# Altium PCB ZYNQ-HS-DEV-PCB.PcbDoc (part 8 of 10)
Units mm, origin at the board's own origin, x right, y up, seen from the top; angles counter-clockwise.
Board outline 125.25 x 111 mm, 10 copper layers (S1 (SIG), S2 (GND), S3 (SIG), S4 (GND), S5 (PWR), S6 (SIG), S7 (GND), S8 (SIG), S9 (GND), S10 (SIG)), stack 1.597 mm thick; 539 components, 408 nets, 2443 pads, 876 vias.
Unrouted connection lines stored in the file: 1310.
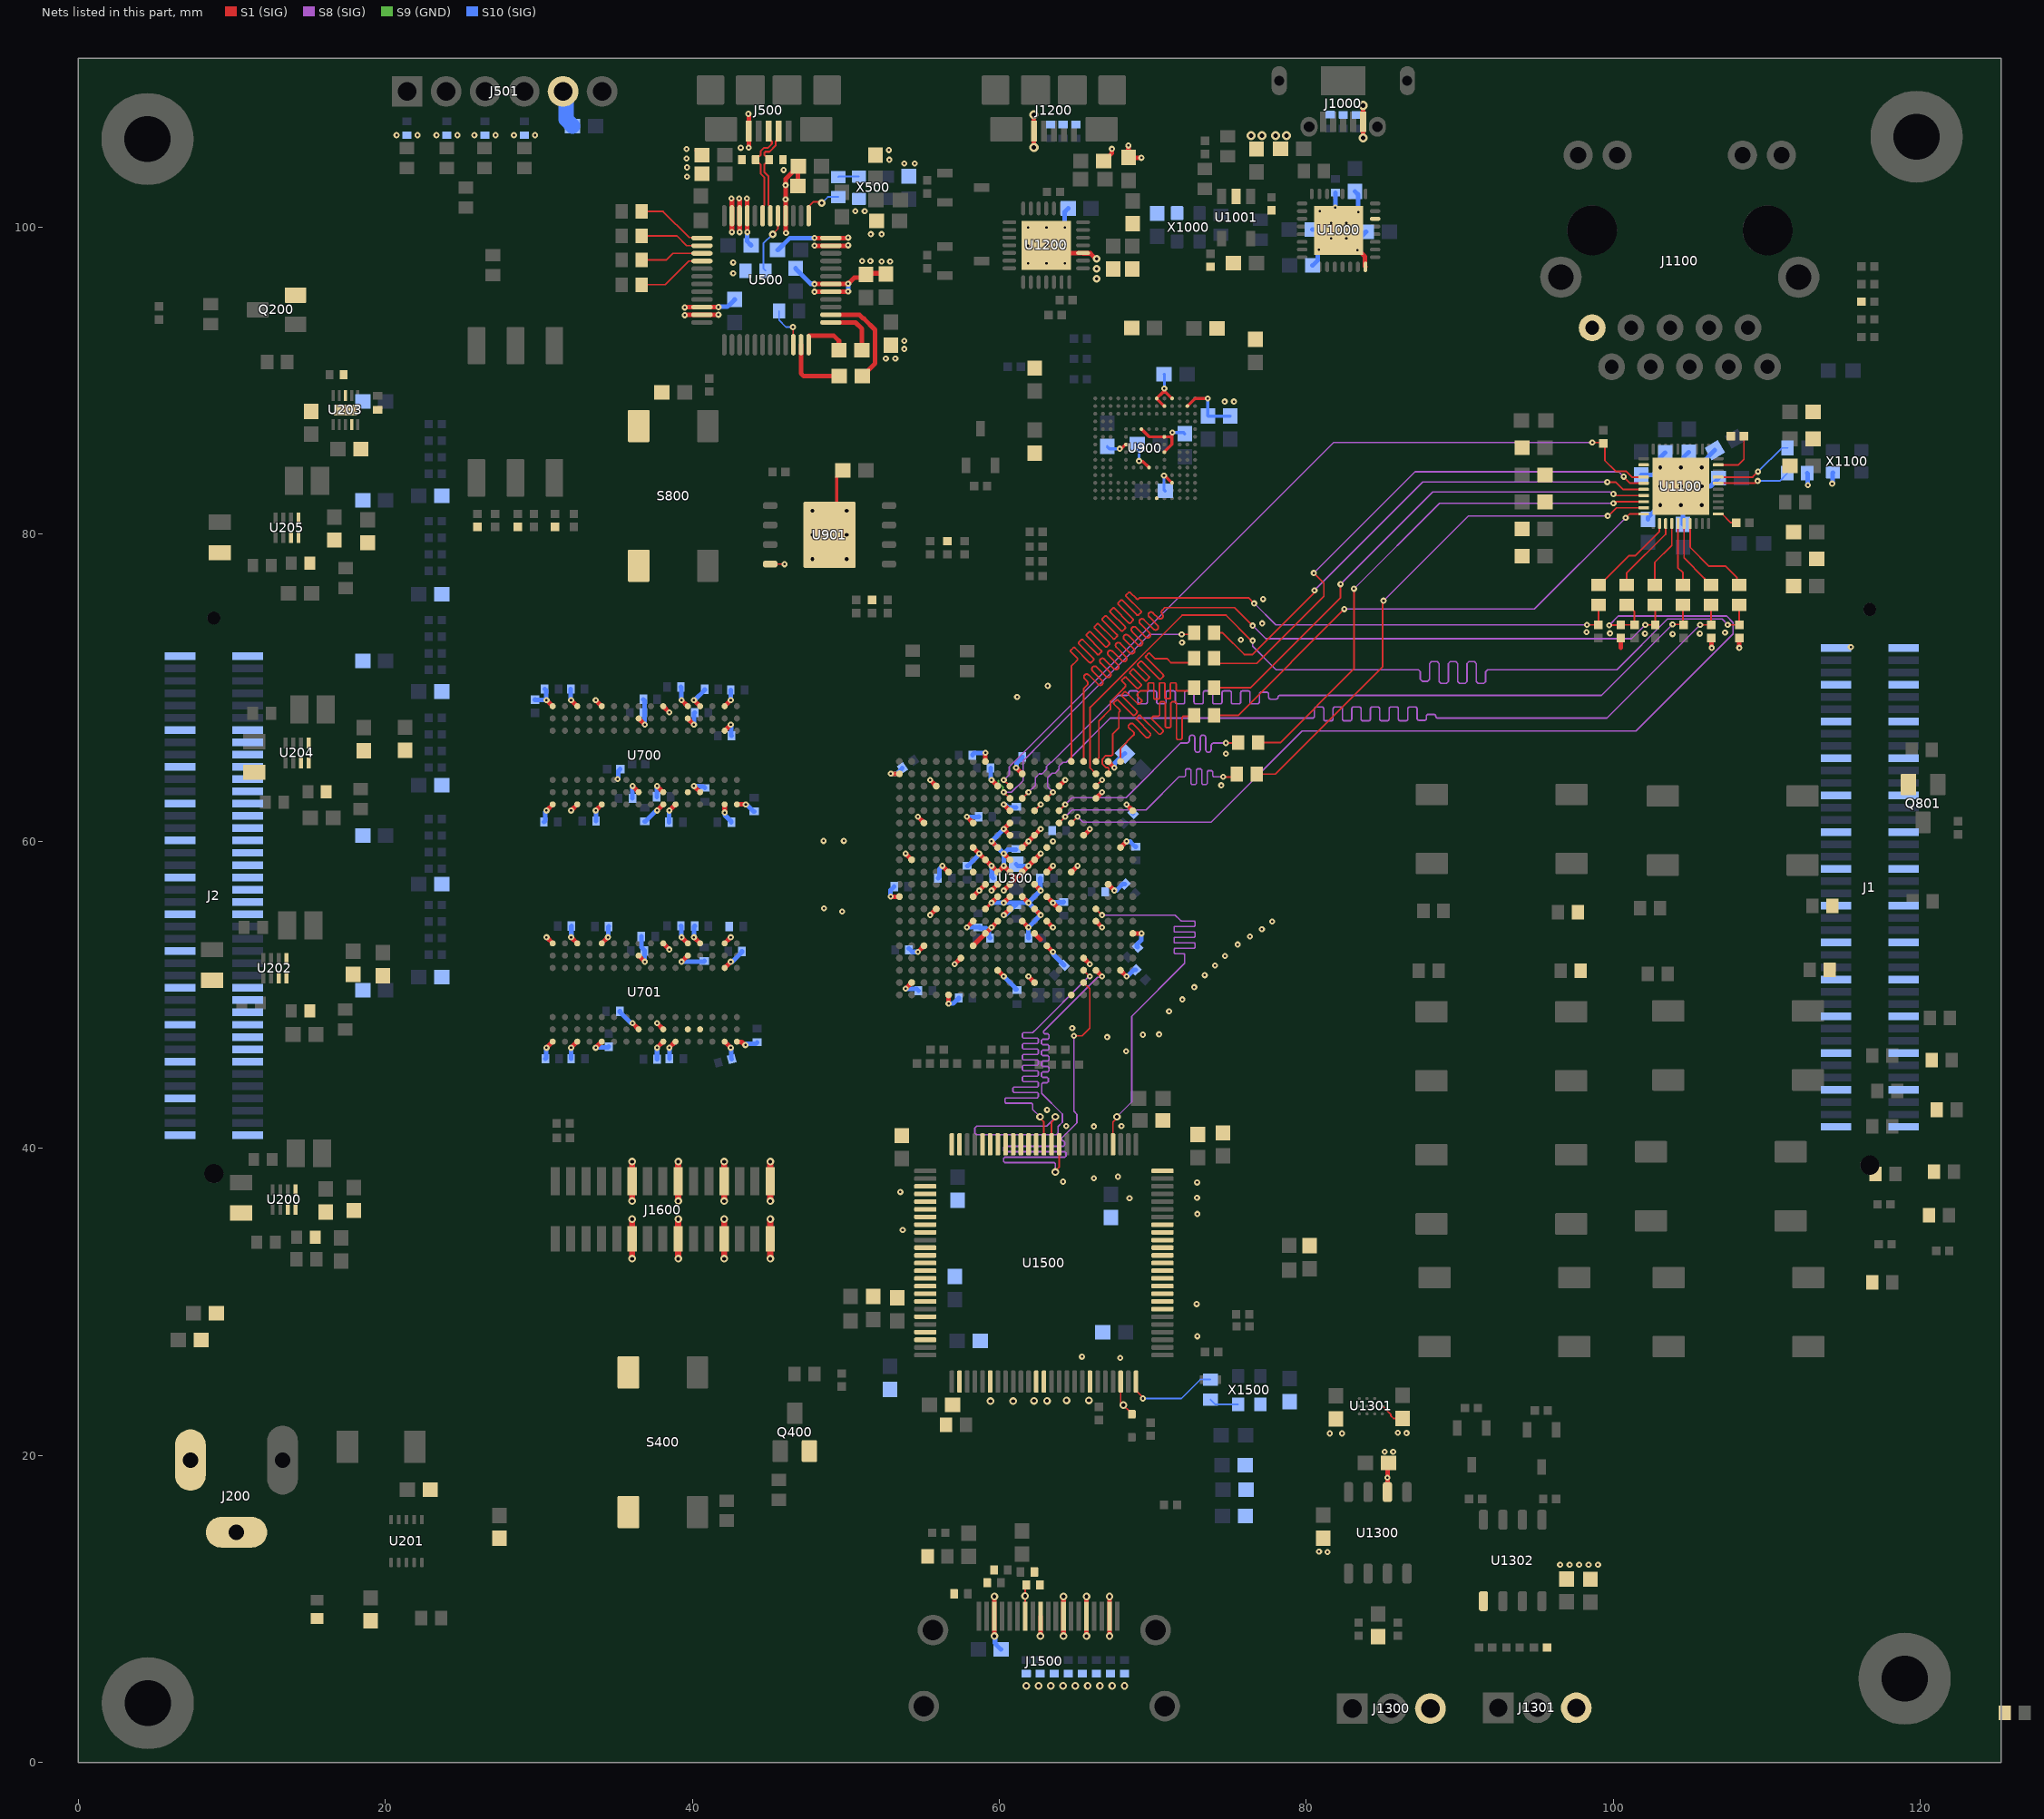
[diagram p12: the nets of this part, all layers, seen from the top]

## Via types
v1: diameter 0.4, hole 0.15, S1 (SIG) to S10 (SIG), tented both sides, 746 vias
v2: diameter 0.5, hole 0.25, S1 (SIG) to S10 (SIG), tented both sides, 108 vias
v3: diameter 0.5, hole 0.2, S1 (SIG) to S10 (SIG), tented both sides, 11 vias
v4: diameter 0.6, hole 0.3, S1 (SIG) to S10 (SIG), tented both sides, 10 vias
v5: diameter 0.45, hole 0.15, S1 (SIG) to S10 (SIG), tented both sides, 1 vias

## Nets (pads, with @x,y where several pads share a name; then routed paths per layer and width w, separated by ;. In a path a pad name is that pad's centre, name@x,y a point inside that pad or via, vN(x,y) a via of type N, cw(c..) or ccw(c..) an arc to the next point about the centre after c; other vN are vias at no path point) (continued)
ETH_MDIO: R1113.1 U300.C10 U1100.14 | length 53.3
  S1 (SIG) w0.11: v1(60.288,63.995) U300.C10@60.688,63.595 ; v1(98.625,85.975) 99.13,85.975 99.18,85.925 R1113.1@99.18,85.805 ; R1113.1@99.35,85.925 99.205,85.78 99.37,85.78 99.445,85.705 99.445,84.803 100.143,84.105 100.822,84.105 101.202,83.725 U1100.14@101.975,83.725
  S8 (SIG) w0.1: v1(60.288,63.995) 60.644,64.351 60.644,64.846 81.773,85.975 v1(98.625,85.975)
ETH_NINT: R1114.1 U300.C17 U1100.31 | length 2
  S1 (SIG) w0.11: U300.C17@66.288,63.595 v1(66.688,63.995) ; U1100.31@106.825,81.325 107.072,81.325 107.624,80.773 107.977,80.773 R1114.1@108,80.75
ETH_PHY_NRST: R805.1 U802.4 U1100.12
ETH_PHY_RX_CLK: R1109.1 U1100.27 | length 6
  S1 (SIG) w0.11: U1100.27@105,80.7 105,79.164 106.241,77.924 107.315,77.924 108.038,77.201 108.038,76.862 R1109.1@108.2,76.7
ETH_PHY_RX_CTL: R1108.1 U1100.26 | length 4.8
  S1 (SIG) w0.11: U1100.26@104.6,80.7 104.6,78.465 105.945,77.12 105.945,77.045 106.29,76.7 R1108.1@106.365,76.7
ETH_PHY_RXD0: R1104.1 U1100.25 | length 4.1
  S1 (SIG) w0.11: U1100.25@104.2,80.7 104.2,77.83 104.53,77.5 R1104.1@104.53,76.7
ETH_PHY_RXD1: R1105.1 U1100.24 | length 4.5
  S1 (SIG) w0.11: R1105.1@102.695,76.7 102.695,78.173 103.8,79.278 U1100.24@103.8,80.7
ETH_PHY_RXD2: R1106.1 U1100.23 | length 5.1
  S1 (SIG) w0.11: R1106.1@100.86,76.7 100.86,77.455 103.4,79.995 U1100.23@103.4,80.7
ETH_PHY_RXD3: R1107.1 U1100.22 | length 5.9
  S1 (SIG) w0.11: R1107.1@99.025,76.7 99.1,76.7 101.015,78.615 101.43,78.615 103,80.185 U1100.22@103,80.7
ETH_PS_NRST: R810.2 U300.E12 U803.2 | length 0.6
  S1 (SIG) w0.11: U300.E12@62.288,61.995 v1(62.688,62.395)
ETH_PS_SCTRO: U802.3 U803.4
ETH_PS_TX_CLK: R811.2 U300.A19 | length 20.6
  S1 (SIG) w0.11: U300.A19@67.888,65.195 67.888,66.063 68.738,66.912 68.776,66.951 68.776,67.054 68.406,67.425 68.406,67.527 68.561,67.682 68.664,67.682 69.594,66.751 69.697,66.751 69.851,66.906 69.851,67.009 68.921,67.939 68.921,68.042 69.075,68.197 69.178,68.197 70.397,66.978 70.5,66.978 70.654,67.133 70.654,67.235 69.926,67.964 69.926,68.067 69.999,68.139 70.312,68.139 70.367,68.139 70.44,68.212 70.44,69.01 70.513,69.083 70.731,69.083 70.804,69.01 70.804,67.47 70.877,67.397 71.095,67.397 71.168,67.47 71.168,69.01 71.241,69.083 71.459,69.083 71.532,69.01 71.532,66.699 71.605,66.626 71.823,66.626 71.896,66.699 71.896,68.067 71.969,68.139 72.3,68.139 72.639,68.139 R811.2@72.7,68.2
ETH_PS_TX_CTL: R816.2 U300.F14 | length 17.3
  S1 (SIG) w0.11: U300.F14@63.888,61.195 v1(64.288,61.595) ; v1(74.575,64.195) 75.295,64.195 R816.2@75.475,64.375
  S8 (SIG) w0.1: v1(64.288,61.595) 64.738,62.045 69.545,62.045 71.7,64.2 72,64.2 72.05,64.2 72.121,64.271 72.121,64.65 72.192,64.721 72.404,64.721 72.475,64.65 72.475,63.769 72.546,63.699 72.758,63.699 72.829,63.769 72.829,64.65 72.9,64.721 73.112,64.721 73.183,64.65 73.183,63.769 73.254,63.699 73.466,63.699 73.537,63.769 73.537,64.533 73.608,64.604 73.82,64.604 73.891,64.533 73.891,64.271 73.962,64.2 74.082,64.2 74.57,64.2 v1(74.575,64.195)
ETH_PS_TXD0: R812.2 U300.E14 | length 17.2
  S1 (SIG) w0.11: U300.E14@63.888,61.995 v1(64.288,62.395) ; v1(74.75,66.4) 75.525,66.4 R812.2@75.55,66.425
  S8 (SIG) w0.1: v1(64.288,62.395) 64.738,62.845 68.245,62.845 71.8,66.4 72.15,66.4 72.2,66.4 ccw(c72.2,66.577) 72.377,66.577 72.377,66.742 cw(c72.554,66.742) 72.731,66.742 72.731,65.975 ccw(c72.908,65.975) 73.085,65.975 73.085,66.742 cw(c73.262,66.742) 73.439,66.742 73.439,65.975 ccw(c73.616,65.975) 73.793,65.975 73.793,66.223 cw(c73.97,66.223) 73.97,66.4 74.35,66.4 v1(74.75,66.4)
ETH_PS_TXD1: R813.2 U300.B18 | length 20.5
  S1 (SIG) w0.11: U300.B18@67.088,64.395 67.131,64.438 67.131,64.72 67.036,64.815 66.93,64.815 66.708,65.037 66.708,65.352 66.93,65.575 67.311,65.575 67.375,65.639 67.375,66.7 67.375,66.99 67.78,67.395 67.78,68.395 67.819,68.434 ccw(c67.741,68.512) 67.819,68.589 67.467,68.942 cw(c67.518,68.993) 67.467,69.045 67.621,69.199 cw(c67.673,69.148) 67.724,69.199 68.701,68.222 ccw(c68.752,68.274) 68.804,68.222 68.958,68.377 ccw(c68.907,68.428) 68.958,68.48 67.981,69.456 cw(c68.033,69.508) 67.981,69.559 68.136,69.714 cw(c68.187,69.662) 68.239,69.714 69.008,68.945 ccw(c69.059,68.996) 69.111,68.945 69.265,69.099 ccw(c69.214,69.151) 69.265,69.202 69.004,69.463 cw(c69.082,69.541) 69.004,69.619 69.18,69.795 69.352,69.795 69.525,69.795 69.58,69.795 ccw(c69.58,69.905) 69.69,69.905 69.69,70.248 cw(c69.763,70.248) 69.763,70.32 69.981,70.32 cw(c69.981,70.248) 70.054,70.248 70.054,69.343 ccw(c70.127,69.343) 70.127,69.27 70.345,69.27 ccw(c70.345,69.343) 70.418,69.343 70.418,70.248 cw(c70.491,70.248) 70.491,70.32 70.709,70.32 cw(c70.709,70.248) 70.782,70.248 70.782,69.359 ccw(c70.855,69.359) 70.855,69.287 71.073,69.287 ccw(c71.073,69.359) 71.146,69.359 71.146,70.248 cw(c71.219,70.248) 71.219,70.32 71.437,70.32 cw(c71.437,70.248) 71.51,70.248 71.51,69.905 ccw(c71.62,69.905) 71.62,69.795 71.825,69.795 72.495,69.795 R813.2@72.7,70
ETH_PS_TXD2: R814.2 U300.D10 | length 18.9
  S1 (SIG) w0.11: v1(60.288,63.195) U300.D10@60.688,62.795 ; v1(71.875,73.475) 72.611,73.475 72.675,73.539 R814.2@72.675,73.575
  S8 (SIG) w0.1: v1(60.288,63.195) 60.783,63.195 61.538,63.95 61.538,65.238 63,66.7 69.775,73.475 v1(71.875,73.475)
  S9 (GND) w0.1: 59.938,63.95 59.938,63.826 60.23,63.533 60.23,63.252 v1(60.288,63.195)
ETH_PS_TXD3: R815.2 U300.A17 | length 19.7
  S1 (SIG) w0.11: U300.A17@66.288,65.195 66.288,65.239 66.478,65.429 66.478,66.7 66.478,67.832 67.235,68.59 67.235,69.11 68.07,69.945 68.092,69.945 68.156,70.01 68.156,70.031 68.195,70.07 ccw(c68.117,70.148) 68.195,70.226 67.998,70.423 cw(c68.049,70.474) 67.998,70.526 68.152,70.68 cw(c68.204,70.629) 68.255,70.68 68.96,69.975 ccw(c69.012,70.027) 69.063,69.975 69.218,70.13 ccw(c69.166,70.181) 69.218,70.233 68.513,70.938 cw(c68.564,70.989) 68.513,71.041 68.667,71.195 cw(c68.719,71.144) 68.77,71.195 69.489,70.477 ccw(c69.54,70.528) 69.592,70.477 69.746,70.631 ccw(c69.695,70.682) 69.746,70.734 69.028,71.453 cw(c69.079,71.504) 69.028,71.555 69.182,71.71 cw(c69.233,71.658) 69.285,71.71 70.413,70.582 ccw(c70.464,70.633) 70.516,70.582 70.67,70.736 ccw(c70.619,70.788) 70.67,70.839 69.542,71.967 cw(c69.594,72.019) 69.542,72.07 69.697,72.225 cw(c69.748,72.173) 69.8,72.225 70.092,71.932 ccw(c70.17,72.01) 70.17,71.9 70.905,71.9 71.165,71.64 72.415,71.64 R815.2@72.7,71.925
ETH_RSET: R1123.2 U1100.39 | length 3.3
  S1 (SIG) w0.11: U1100.39@106.825,84.525 108.148,84.525 108.5,84.877 R1123.2@108.5,86.4
ETH_RX_CLK: R1109.2 R1110.2 U300.B17 | length 62.7
  S1 (SIG) w0.11: U300.B17@66.288,64.395 65.908,64.775 65.908,68.733 71.91,74.735 74.763,74.735 76.423,73.075 v1(76.5,73.075) ; v1(107.45,74.1) R1110.2@108.2,74.1 R1109.2@108.2,75.4
  S8 (SIG) w0.1: v1(76.5,73.075) 76.5,72.7 78.025,71.175 80.125,71.175 87.301,71.175 87.422,71.053 87.422,70.547 87.544,70.425 87.909,70.425 88.03,70.547 88.03,71.577 88.152,71.699 88.517,71.699 88.638,71.577 88.638,70.4 88.76,70.278 89.125,70.278 89.246,70.4 89.246,71.577 89.368,71.699 89.733,71.699 89.854,71.577 89.854,70.4 89.976,70.278 90.341,70.278 90.462,70.4 90.462,71.577 90.584,71.699 90.949,71.699 91.07,71.577 91.07,70.4 91.192,70.278 91.557,70.278 91.678,70.4 91.678,71.053 91.8,71.175 91.85,71.175 100.225,71.175 103.525,74.475 107.075,74.475 v1(107.45,74.1)
ETH_RX_CTL: R1108.2 R1111.2 U300.D13 | length 60.2
  S1 (SIG) w0.11: U300.D13@63.088,62.795 v1(63.488,63.195) ; v1(105.65,74.1) R1111.2@106.375,74.1 106.365,74.11 R1108.2@106.365,75.4
  S8 (SIG) w0.1: v1(63.488,63.195) 63.138,63.545 63.138,64.14 63.443,64.445 63.633,64.445 63.888,64.7 63.888,64.89 64.143,65.145 64.345,65.145 67.225,68.025 80.35,68.025 80.4,68.025 ccw(c80.4,68.147) 80.522,68.147 80.522,68.625 cw(c80.643,68.625) 80.643,68.746 81.008,68.746 cw(c81.008,68.625) 81.13,68.625 81.13,67.965 ccw(c81.251,67.965) 81.251,67.844 81.616,67.844 ccw(c81.616,67.965) 81.738,67.965 81.738,68.625 cw(c81.859,68.625) 81.859,68.746 82.224,68.746 cw(c82.224,68.625) 82.346,68.625 82.346,67.965 ccw(c82.467,67.965) 82.467,67.844 82.832,67.844 ccw(c82.832,67.965) 82.954,67.965 82.954,68.625 cw(c83.075,68.625) 83.075,68.746 83.44,68.746 cw(c83.44,68.625) 83.562,68.625 83.562,67.965 ccw(c83.683,67.965) 83.683,67.844 84.048,67.844 ccw(c84.048,67.965) 84.17,67.965 84.17,68.625 cw(c84.291,68.625) 84.291,68.746 84.656,68.746 cw(c84.656,68.625) 84.778,68.625 84.778,67.965 ccw(c84.899,67.965) 84.899,67.844 85.264,67.844 ccw(c85.264,67.965) 85.386,67.965 85.386,68.625 cw(c85.507,68.625) 85.507,68.746 85.872,68.746 cw(c85.872,68.625) 85.994,68.625 85.994,67.965 ccw(c86.115,67.965) 86.115,67.844 86.48,67.844 ccw(c86.48,67.965) 86.602,67.965 86.602,68.625 cw(c86.723,68.625) 86.723,68.746 87.088,68.746 cw(c87.088,68.625) 87.21,68.625 87.21,68.003 ccw(c87.331,68.003) 87.331,67.881 87.696,67.881 ccw(c87.696,68.003) 87.818,68.003 87.818,68.147 cw(c87.939,68.147) 87.939,68.268 88.304,68.268 cw(c88.304,68.147) 88.426,68.147 ccw(c88.547,68.147) 88.547,68.025 90.625,68.025 99.575,68.025 v1(105.65,74.1)
ETH_RXD0: R1100.1 R1104.2 U300.D11 | length 60.5
  S1 (SIG) w0.11: U300.D11@61.488,62.795 v1(61.888,63.195) ; v1(103.85,74.125) 104.55,74.125 R1100.1@104.575,74.1 104.53,74.145 R1104.2@104.53,75.4
  S8 (SIG) w0.1: v1(61.888,63.195) 62.338,63.645 62.338,64.14 62.593,64.395 62.783,64.395 63.063,64.675 63.063,64.865 63.343,65.145 63.395,65.145 67.754,69.504 68.25,69.504 68.3,69.504 ccw(c68.3,69.625) 68.422,69.625 68.422,69.676 cw(c68.543,69.676) 68.543,69.798 68.908,69.798 cw(c68.908,69.676) 69.03,69.676 69.03,69.072 ccw(c69.151,69.072) 69.151,68.951 69.516,68.951 ccw(c69.516,69.072) 69.638,69.072 69.638,69.676 cw(c69.759,69.676) 69.759,69.798 70.124,69.798 cw(c70.124,69.676) 70.246,69.676 70.246,69.072 ccw(c70.367,69.072) 70.367,68.951 70.732,68.951 ccw(c70.732,69.072) 70.854,69.072 70.854,69.676 cw(c70.975,69.676) 70.975,69.798 71.34,69.798 cw(c71.34,69.676) 71.462,69.676 71.462,69.072 ccw(c71.583,69.072) 71.583,68.951 71.948,68.951 ccw(c71.948,69.072) 72.07,69.072 72.07,69.676 cw(c72.191,69.676) 72.191,69.798 72.556,69.798 cw(c72.556,69.676) 72.678,69.676 72.678,69.072 ccw(c72.799,69.072) 72.799,68.951 73.164,68.951 ccw(c73.164,69.072) 73.286,69.072 73.286,69.676 cw(c73.407,69.676) 73.407,69.798 73.772,69.798 cw(c73.772,69.676) 73.894,69.676 73.894,69.072 ccw(c74.015,69.072) 74.015,68.951 74.38,68.951 ccw(c74.38,69.072) 74.502,69.072 74.502,69.676 cw(c74.623,69.676) 74.623,69.798 74.988,69.798 cw(c74.988,69.676) 75.11,69.676 75.11,69.072 ccw(c75.231,69.072) 75.231,68.951 75.596,68.951 ccw(c75.596,69.072) 75.718,69.072 75.718,69.676 cw(c75.839,69.676) 75.839,69.798 76.204,69.798 cw(c76.204,69.676) 76.326,69.676 76.326,69.072 ccw(c76.447,69.072) 76.447,68.951 76.812,68.951 ccw(c76.812,69.072) 76.934,69.072 76.934,69.586 cw(c77.055,69.586) 77.055,69.708 77.42,69.708 cw(c77.42,69.586) 77.542,69.586 77.542,69.382 ccw(c77.663,69.382) 77.663,69.26 78.028,69.26 ccw(c78.028,69.382) 78.15,69.382 cw(c78.271,69.382) 78.271,69.504 85.15,69.504 99.229,69.504 v1(103.85,74.125)
ETH_RXD1: R1101.1 R1105.2 U300.A16 | length 65.3
  S1 (SIG) w0.11: U300.A16@65.488,65.195 65.488,69.938 65.677,70.126 65.715,70.165 ccw(c65.587,70.294) 65.715,70.423 65.56,70.579 cw(c65.688,70.707) 65.56,70.836 cw(c65.688,70.707) 65.817,70.836 66.44,70.212 ccw(c66.569,70.341) 66.698,70.212 ccw(c66.569,70.341) 66.698,70.47 66.074,71.093 cw(c66.203,71.222) 66.074,71.351 cw(c66.203,71.222) 66.332,71.351 66.955,70.727 ccw(c67.084,70.856) 67.213,70.727 ccw(c67.084,70.856) 67.213,70.985 66.589,71.608 cw(c66.718,71.737) 66.589,71.866 cw(c66.718,71.737) 66.846,71.866 67.47,71.242 ccw(c67.599,71.371) 67.727,71.242 ccw(c67.599,71.371) 67.727,71.499 67.104,72.123 cw(c67.233,72.252) 67.104,72.38 cw(c67.233,72.252) 67.361,72.38 67.985,71.757 ccw(c68.113,71.886) 68.242,71.757 ccw(c68.113,71.886) 68.242,72.014 67.619,72.638 cw(c67.747,72.766) 67.619,72.895 cw(c67.747,72.766) 67.876,72.895 68.5,72.272 ccw(c68.628,72.4) 68.757,72.272 ccw(c68.628,72.4) 68.757,72.529 68.133,73.153 cw(c68.262,73.281) 68.133,73.41 cw(c68.262,73.281) 68.391,73.41 69.014,72.786 ccw(c69.143,72.915) 69.272,72.786 ccw(c69.143,72.915) 69.272,73.044 68.648,73.667 cw(c68.777,73.796) 68.648,73.925 cw(c68.777,73.796) 68.906,73.925 69.529,73.301 ccw(c69.658,73.43) 69.786,73.301 ccw(c69.658,73.43) 69.786,73.559 69.163,74.182 cw(c69.292,74.311) 69.163,74.439 cw(c69.292,74.311) 69.42,74.439 70.044,73.816 ccw(c70.173,73.945) 70.301,73.816 ccw(c70.173,73.945) 70.301,74.073 69.753,74.621 cw(c69.882,74.75) 69.753,74.879 cw(c69.882,74.75) 70.011,74.879 70.348,74.541 ccw(c70.477,74.67) 70.606,74.541 ccw(c70.477,74.67) 70.606,74.798 cw(c70.734,74.927) 70.606,75.056 70.775,75.225 70.998,75.225 75.325,75.225 v1(76.5,74.05) ; v1(102.075,74.1) R1101.1@102.725,74.1 102.725,75.37 R1105.2@102.695,75.4
  S8 (SIG) w0.1: v1(76.5,74.05) 77.35,73.2 101.175,73.2 v1(102.075,74.1)
ETH_RXD2: R1102.1 R1106.2 R1112.2 U300.F15 | length 61
  S1 (SIG) w0.11: U300.F15@64.688,61.195 v1(65.088,61.595) ; v1(99.725,74.075) 100.45,74.075 R1112.2@100.475,74.1 R1102.1@101.375,74.1 101.375,74.96 100.935,75.4 R1106.2@100.86,75.4
  S8 (SIG) w0.1: v1(65.088,61.595) 65.438,61.245 70.175,61.245 73.795,61.245 79.725,67.175 101.47,67.175 107.8,73.505 107.8,74.245 107.37,74.675 100.325,74.675 v1(99.725,74.075)
ETH_RXD3: R1103.1 R1107.2 U300.A15 | length 65.8
  S1 (SIG) w0.11: U300.A15@64.688,65.195 64.688,71.413 65.025,71.75 65.064,71.789 ccw(c64.986,71.867) 65.064,71.944 64.66,72.349 cw(c64.711,72.4) 64.66,72.452 64.814,72.606 cw(c64.865,72.555) 64.917,72.606 65.87,71.653 ccw(c65.921,71.705) 65.973,71.653 66.127,71.808 ccw(c66.076,71.859) 66.127,71.911 65.174,72.864 cw(c65.226,72.915) 65.174,72.967 65.329,73.121 cw(c65.38,73.069) 65.432,73.121 66.385,72.168 ccw(c66.436,72.219) 66.488,72.168 66.642,72.322 ccw(c66.591,72.374) 66.642,72.425 65.689,73.378 cw(c65.741,73.43) 65.689,73.481 65.844,73.636 cw(c65.895,73.584) 65.947,73.636 66.9,72.683 ccw(c66.951,72.734) 67.002,72.683 67.157,72.837 ccw(c67.105,72.889) 67.157,72.94 66.204,73.893 cw(c66.255,73.945) 66.204,73.996 66.358,74.15 cw(c66.41,74.099) 66.461,74.15 67.414,73.197 ccw(c67.466,73.249) 67.517,73.197 67.672,73.352 ccw(c67.62,73.403) 67.672,73.455 66.719,74.408 cw(c66.77,74.459) 66.719,74.511 66.873,74.665 cw(c66.925,74.614) 66.976,74.665 67.929,73.712 ccw(c67.981,73.764) 68.032,73.712 68.186,73.867 ccw(c68.135,73.918) 68.186,73.97 67.233,74.923 cw(c67.285,74.974) 67.233,75.026 67.388,75.18 cw(c67.439,75.129) 67.491,75.18 68.444,74.227 ccw(c68.495,74.279) 68.547,74.227 68.701,74.381 ccw(c68.65,74.433) 68.701,74.484 67.748,75.437 cw(c67.8,75.489) 67.748,75.54 67.903,75.695 cw(c67.954,75.643) 68.006,75.695 68.959,74.742 ccw(c69.01,74.793) 69.062,74.742 69.216,74.896 ccw(c69.165,74.948) 69.216,74.999 68.263,75.952 cw(c68.314,76.004) 68.263,76.055 68.417,76.21 cw(c68.469,76.158) 68.52,76.21 68.925,75.805 ccw(c69.003,75.883) 69.08,75.805 69.125,75.85 69.623,75.85 76.25,75.85 v1(76.6,75.5) ; v1(98.275,74.1) R1103.1@99.025,74.1 R1107.2@99.025,75.4
  S8 (SIG) w0.1: v1(76.6,75.5) 78,74.1 v1(98.275,74.1)
ETH_TX_CLK: R811.1 U1100.20 | length 33.4
  S1 (SIG) w0.11: R811.1@74,68.2 75.55,68.2 v1(82.475,75.125) ; v1@100.816,81.075 101.066,81.325 U1100.20@101.975,81.325
  S8 (SIG) w0.1: v1(82.475,75.125) 94.85,75.125 v1(100.8,81.075)
ETH_TX_CTL: R816.1 U1100.19 | length 34.7
  S1 (SIG) w0.11: R816.1@76.9,64.38 77.98,64.38 84.97,71.369 84.97,75.62 v1(85.025,75.675) ; v1(99.625,81.2) 99.677,81.2 100.202,81.725 U1100.19@101.975,81.725
  S8 (SIG) w0.1: v1(85.025,75.675) 90.55,81.2 v1(99.625,81.2)
ETH_TXD0: R812.1 U1100.18 | length 34.7
  S1 (SIG) w0.11: R812.1@76.85,66.425 78.3,66.425 83.1,71.225 v1(83.1,76.45) ; v1(100,82.025) 100.078,82.025 100.178,82.125 U1100.18@101.975,82.125
  S8 (SIG) w0.1: v1(83.1,76.45) 88.675,82.025 v1(100,82.025)
ETH_TXD1: R813.1 U1100.17 | length 33.9
  S1 (SIG) w0.11: R813.1@74,70 76.348,70 82.225,75.877 v1(82.225,76.75) ; v1(100,82.625) 100.078,82.625 100.178,82.525 U1100.17@101.975,82.525
  S8 (SIG) w0.1: v1(82.225,76.75) 88.225,82.75 99.794,82.75 99.919,82.625 v1(100,82.625)
ETH_TXD2: R814.1 U1100.16 | length 33.5
  S1 (SIG) w0.11: R814.1@73.975,73.575 74.548,73.575 75.953,72.17 76.497,72.17 80.47,76.142 80.47,76.295 v1(80.525,76.35) ; v1(99.6,83.4) 100.15,83.4 100.625,82.925 U1100.16@101.975,82.925
  S8 (SIG) w0.1: v1(80.525,76.35) 87.575,83.4 v1(99.6,83.4)
ETH_TXD3: R815.1 U1100.15 | length 35.4
  S1 (SIG) w0.11: R815.1@74,71.925 74.335,71.59 76.768,71.59 81.14,75.962 81.14,76.81 v1(80.475,77.475) ; v1@100.675,83.743 101.093,83.325 U1100.15@101.975,83.325
  S8 (SIG) w0.1: v1(80.475,77.475) 87.075,84.075 100.35,84.075 v1(100.675,83.75)
ETH_XTAL_IN: R1117.1 U1100.36 | length 4.8
  S1 (SIG) w0.11: U1100.36@106.825,83.325 109.25,83.325 v1(109.4,83.475)
  S10 (SIG) w0.11: v1(109.4,83.475) 110.825,83.475 R1117.1@111.325,83.975
ETH_XTAL_OUT: R1119.1 U1100.37 | length 5.3
  S1 (SIG) w0.11: U1100.37@106.825,83.725 109.075,83.725 v1(109.425,84.075)
  S10 (SIG) w0.11: v1(109.425,84.075) 110.975,85.625 R1119.1@111.35,85.625
FTDI_COUT: R510.1 X500.3 | length 1.4
  S10 (SIG) w0.11: R510.1@49.5,103.275 49.525,103.3 X500.3@50.85,103.3
FTDI_D_N: D501.2 J500.2 U500.6 | length 6.5
  S1 (SIG) w0.121: U500.6@45.075,100.75 45.075,101.334 44.949,101.46 44.949,103.337 44.687,103.6 44.687,104.09 44.758,104.161 44.811,104.161 45,104.35 D501.2@45,104.4 45,104.45 44.811,104.639 44.758,104.639 44.687,104.71 44.687,104.849 44.758,104.92 45.02,104.92 45.424,105.324 45.424,105.587 45.625,105.787 J500.2@45.625,106.262
FTDI_D_P: D500.2 J500.3 U500.7 | length 6.5
  S1 (SIG) w0.121: D500.2@44.125,104.4 44.125,104.35 44.314,104.161 44.368,104.161 44.438,104.09 44.438,103.497 44.701,103.235 44.701,101.46 44.575,101.334 U500.7@44.575,100.75 ; D500.2@44.125,104.45 44.314,104.639 44.368,104.639 44.438,104.71 44.438,104.952 44.655,105.168 44.917,105.168 45.176,105.427 45.176,105.587 44.975,105.787 J500.3@44.975,106.262
FTDI_OSCI: R510.2 U500.1 | length 2.8
  S1 (SIG) w0.11: U500.1@47.575,100.75 47.575,101.351 47.749,101.525 47.75,101.525 47.875,101.65 48.35,101.65 v3(48.425,101.575)
  S10 (SIG) w0.11: v3(48.425,101.575) 48.825,101.975 R510.2@49.5,101.975
FTDI_REF: R508.1 U500.5 | length 4
  S1 (SIG) w0.11: v3(45.225,99.55) 45.575,99.9 U500.5@45.575,100.75
  S10 (SIG) w0.11: R508.1@44.775,97.175 44.625,97.325 44.625,98.95 v3(45.225,99.55)
FTDI_RST: R504.2 U500.34 | length 2.8
  S1 (SIG) w0.11: v1(46.55,93.5) 46.563,93.487 46.563,92.362 U500.34@46.575,92.35
  S10 (SIG) w0.11: R504.2@45.65,94.55 45.65,93.95 46.1,93.5 v1(46.55,93.5)
FTDI_TCK: R500.1 U500.13 | length 4.6
  S1 (SIG) w0.11: R500.1@36.7,101.033 38.092,101.033 39.789,99.336 40.589,99.336 U500.13@40.625,99.3
FTDI_TDI: R501.1 U500.14 | length 4.2
  S1 (SIG) w0.11: R501.1@36.7,99.442 38.983,99.442 39.625,98.8 U500.14@40.625,98.8
FTDI_TDO: R502.1 U500.15 | length 4.1
  S1 (SIG) w0.11: R502.1@36.7,97.875 38.322,97.875 38.747,98.3 U500.15@40.625,98.3
FTDI_TMS: R503.1 U500.16 | length 4.6
  S1 (SIG) w0.11: R503.1@36.7,96.258 38.233,96.258 39.775,97.8 U500.16@40.625,97.8
FTDI_VCCA: C514.2 U500.37 | length 2.9
  S1 (SIG) w0.3: 49.725,93.8 50.625,93.8 51.05,93.375 C514.2@51.05,92
FTDI_VCORE: C513.2 U500.38 | length 6.6
  S1 (SIG) w0.11: U500.38@49.025,94.3 49.725,94.3
  S1 (SIG) w0.3: 49.725,94.3 50.884,94.3 51.134,94.05 51.175,94.05 51.9,93.325 51.9,91.125 C513.2@51.075,90.3
GND: C201.1 C202.1 C203.1 C204.1 C205.1 C206.1 C208.1 C209.1 C210.1 C211.1 C212.1 C213.1 C214.1 C216.1 C217.1 C218.1 C220.1 C221.1 C222.1 C300.1 C301.1 C302.1 C303.2 C304.1 C305.1 C306.1 C307.1 C308.1 C309.1 C310.1 C311.1 C312.2 C313.1 C314.1 C315.2 C316.1 C317.1 C318.1 C319.1 C320.1 C321.1 C322.1 C323.2 C324.1 C325.1 C326.1 C327.1 C328.1 C329.1 C330.1 C331.2 C332.1 C333.1 C334.1 C335.1 C336.1 C337.1 C338.1 C339.1 C340.1 C341.1 C342.1 C343.1 C344.1 C345.1 C346.2 C347.1 C348.1 C349.2 C350.1 C351.1 C352.1 C353.1 C354.1 C355.1 C356.1 C357.1 C500.1 C501.1 C502.1 C503.1 C504.1 C505.1 C506.1 C507.1 C508.1 C509.1 C510.1 C511.1 C512.1 C513.1 C514.1 C515.1 C516.1 C600.1 C601.1 C602.1 C603.1 C604.1 C605.1 C606.1 C607.1 C608.1 C609.1 C610.1 C611.1 C612.1 C701.1 C702.1 C703.1 C704.1 C705.1 C707.1 C708.1 C709.1 C710.1 C711.1 C712.1 C713.1 C714.1 C715.1 C716.1 C717.1 C718.1 C719.1 C720.1 C721.1 C722.1 C723.1 C725.1 C726.1 C727.1 C728.1 C729.1 C731.1 C732.1 C733.1 C734.1 C735.1 C736.1 C737.1 C738.1 C739.1 C740.1 C741.1 C742.1 C743.1 C744.1 C745.1 C800.1 C801.1 C802.1 C803.2 C804.1 C805.1 C806.1 C900.1 C901.1 C902.1 C903.1 C904.1 C905.1 C906.1 C907.1 C908.1 C909.1 C910.1 C911.1 C912.1 C1000.1 C1001.1 C1002.1 C1003.1 C1004.1 C1005.1 C1006.1 C1007.1 C1008.1 C1100.1 C1101.1 C1102.1 C1103.1 C1104.1 C1105.1 C1106.1 C1107.1 C1108.1 C1109.1 C1110.1 C1111.1 C1112.1 C1113.1 C1114.1 C1115.1 C1116.1 C1117.1 C1200.1 C1201.1 C1202.1 C1203.1 C1204.1 C1205.1 C1300.1 C1301.1 C1302.1 C1303.1 C1304.1 C1305.1 C1306.1 C1500.1 C1501.1 C1502.1 C1503.1 C1504.1 C1505.1 C1506.1 C1507.1 C1508.1 C1509.1 C1510.1 C1511.1 C1512.1 C1513.1 C1514.1 C1515.1 C1516.1 C1517.1 C1520.1 D500.1 D501.1 D502.1 D503.1 D504.1 D505.1 D1000.1 D1001.1 D1002.1 D1200.1 D1201.1 D1202.1 D1400.2 D1401.2 D1402.2 D1501.1 D1502.1 D1503.1 D1504.1 D1505.1 D1506.1 D1507.1 D1508.1 D1509.1 D1510.1 D1511.1 D1512.1 D1513.1 J1.1 J1.2 J1.7 J1.8 J1.13 J1.14 J1.19 J1.20 J1.25 J1.26 J1.31 J1.32 J1.37 J1.38 J1.43 J1.44 J1.49 J1.50 J1.55 J1.56 J1.61 J1.62 J1.67 J1.68 J1.73 J1.74 J1.79 J1.80 J2.1 J2.2 J2.13 J2.14 J2.16 J2.18 J2.19 J2.20 J2.22 J2.24 J2.25 J2.26 J2.28 J2.30 J2.31 J2.32 J2.34 J2.36 J2.37 J2.38 J2.40 J2.42 J2.43 J2.44 J2.49 J2.55 J2.56 J2.58 J2.60 J2.61 J2.62 J2.64 J2.66 J2.67 J2.68 J2.73 J2.79 J2.80 J200.2 J200.3 J500.5 J501.5 J1000.5 J1100.10 J1200.5 J1300.3 J1301.3 J1500.2 J1500.5 J1500.8 J1500.11 J1500.17 J1600.1 J1600.1_1 J1600.4 J1600.4_1 J1600.7 J1600.7_1 J1600.10 J1600.10_1 Q200.2 Q400.2 Q801.2 R204.1 R205.1 R209.1 R215.1 R218.1 R300.2 R508.2 R626.1 R627.1 R700.1 R701.1 R802.1 R804.2 R807.1 R810.1 R823.2 R824.2 R916.1 R917.1 R918.1 R919.1 R920.1 R1005.1 R1006.1 R1110.1 R1111.1 R1112.1 R1117.2 R1120.1 R1123.1 R1308.1 R1405.2 R1406.2 R1412.2 R1413.2 R1414.2 R1415.2 R1505.1 R1509.1 S400.1 S400.2 S800.1 S800.2 U200.3 U200.4 U200.5 U201.11 U202.3 U202.4 U202.5 U203.4 U203.8 U203.11 U204.3 U204.4 U204.5 U205.3 U205.4 U205.5 U300.A8 U300.A18 U300.B1 U300.B11 U300.C4 U300.C9 U300.C14 U300.D17 U300.E10 U300.E20 U300.F3 U300.F7 U300.F10 U300.G10 U300.G12 U300.G16 U300.H7 U300.H9 U300.H11 U300.H13 U300.H19 U300.J2 U300.J8 U300.J10 U300.J12 U300.K5 U300.K7 U300.K9 U300.K10 U300.K11 U300.K13 U300.K15 U300.L8 U300.L9 U300.L10 U300.L12 U300.L18 U300.M1 U300.M7 U300.M9 U300.M10 U300.M11 U300.M13 U300.N4 U300.N8 U300.N10 U300.N12 U300.N14 U300.P7 U300.P9 U300.P11 U300.P13 U300.P17 U300.R8 U300.R12 U300.R20 U300.T3 U300.T7 U300.T13 U300.U6 U300.U16 U300.V9 U300.V19 U300.W2 U300.W12 U300.Y5 U300.Y15 U500.4 U500.9 U500.10 U500.11 U500.22 U500.23 U500.35 U500.36 U500.41 U500.42 U500.47 U500.48 U700.A9 U700.B1 U700.B3 U700.B9 U700.D1 U700.D8 U700.E1 U700.E2 U700.E8 U700.F9 U700.G1 U700.G8 U700.G9 U700.J2 U700.J8 U700.M1 U700.M9 U700.P1 U700.P9 U700.T1 U700.T9 U701.A9 U701.B1 U701.B3 U701.B9 U701.D1 U701.D8 U701.E1 U701.E2 U701.E8 U701.F9 U701.G1 U701.G8 U701.G9 U701.J2 U701.J8 U701.M1 U701.M9 U701.P1 U701.P9 U701.T1 U701.T9 U800.3 U802.2 U803.3 U900.A6 U900.C4 U900.E7 U900.G5 U900.H10 U900.J5 U900.K8 U900.N2 U900.N5 U900.P4 U900.P6 U901.4 U901.9 U1000.8 U1000.14 U1000.33 U1001.2 U1100.41 U1200.3 U1200.29 U1300.2 U1301.D2 U1302.5 U1500.3 U1500.4 U1500.5 U1500.6 U1500.7 U1500.8 U1500.9 U1500.11 U1500.12 U1500.13 U1500.14 U1500.15 U1500.16 U1500.17 U1500.18 U1500.20 U1500.22 U1500.23 U1500.27 U1500.31 U1500.37 U1500.38 U1500.44 U1500.57 U1500.58 U1500.59 U1500.60 U1500.61 U1500.62 U1500.63 U1500.64 U1500.65 U1500.66 U1500.67 U1500.68 U1500.75 U1500.89 U1500.90 U1500.91 U1500.92 U1500.93 U1500.94 U1500.95 U1500.96 U1500.99 U1500.100 X500.2 X800.2 X1000.2 X1100.2 X1500.2 | length 267.5
  S1 (SIG) w0.11: U901.4@45.067,78.058 v1@45.992,78.058 ; U1301.D2@84.95,23.2 85.5,22.65 85.5,22.575 85.675,22.4 C1301.1@86.275,22.4
  S1 (SIG) w0.2: U901.9@48.937,79.963 49.4,80.426 49.4,83.775 49.775,84.15 C912.1@49.8,84.15 ; U300.N8@59.088,55.595 v1(59.488,55.995) ; v1(67.846,85.575) 67.885,85.614 67.996,85.614 68.233,85.85 U900.H10@68.246,85.85 ; v1(69.096,84.775) 69.135,84.737 69.36,84.737 U900.E7@69.746,84.35 ; U900.K8@69.246,86.85 69.746,86.35 U900.J5@70.746,86.35 71.133,86.35 71.25,86.233 ; v1(70.721,83.825) 70.758,83.825 71.233,83.35 U900.C4@71.246,83.35 ; U900.G5@70.746,85.35 71.25,85.854 71.25,86.233 ; U900.N5@70.746,88.35 U900.P6@70.246,88.85 70.664,89.267 ; v1(70.75,89.5) 70.712,89.462 70.712,89.316 70.664,89.267 ; U900.P4@71.246,88.85 70.829,89.267 70.664,89.267 ; v1(71.275,86.625) 71.25,86.6 71.25,86.233 ; U900.N2@72.246,88.35 72.746,88.85 73.125,88.85 v1(73.575,88.85)
  S1 (SIG) w0.3: v1(30.5,46.55) U701.T9@30.9,46.95 ; v1(30.5,53.75) U701.T1@30.9,53.35 ; v1(30.5,62) U700.T9@30.9,62.4 ; v1(30.5,69.2) U700.T1@30.9,68.8 ; v1(32.1,46.55) U701.P9@32.5,46.95 ; v1(32.1,53.75) U701.P1@32.5,53.35 ; v1(32.1,62) U700.P9@32.5,62.4 ; v1(32.1,69.2) U700.P1@32.5,68.8 ; v1(33.7,46.55) U701.M9@34.1,46.95 ; v1(33.7,62) U700.M9@34.1,62.4 ; v1(33.7,69.2) U700.M1@34.1,68.8 ; U701.M1@34.1,53.35 v1(34.5,53.75) ; v1(36.1,48.15) U701.J8@36.5,47.75 ; v1(36.1,63.6) U700.J8@36.5,63.2 ; U701.J2@36.5,52.55 v1(36.9,52.15) ; U700.J2@36.5,68 v1(36.9,67.6) ; v1(37.7,46.55) U701.G9@38.1,46.95 ; v1(37.7,48.15) U701.G8@38.1,47.75 ; v1(37.7,62) U700.G9@38.1,62.4 ; v1(37.7,63.6) U700.G8@38.1,63.2 ; U701.G1@38.1,53.35 v1(38.5,52.95) ; U700.G1@38.1,68.8 v1(38.5,68.4) ; v1(38.5,46.55) U701.F9@38.9,46.95 ; v1(38.5,62) U700.F9@38.9,62.4 ; v1(39.3,52.15) U701.E2@39.7,52.55 ; v1(39.3,53.75) U701.E1@39.7,53.35 ; v1(39.3,69.2) U700.E1@39.7,68.8 ; v1(39.5,94.275) 39.527,94.275 39.552,94.3 U500.23@40.625,94.3 v1(41.698,94.3) ; v1(39.5,94.775) 39.527,94.775 39.552,94.8 U500.22@40.625,94.8 v1(41.698,94.8) ; U700.E2@39.7,68 v1(40.1,67.6) ; v1(40.1,53.75) U701.D1@40.5,53.35 ; v1(40.1,63.6) U700.D8@40.5,63.2 ; v1(40.1,69.2) U700.D1@40.5,68.8 ; C503.1@40.3,105 C503.1@40.625,104.675 ; C502.1@40.6,103.6 C502.1@40.625,103.575 ; U701.B9@42.1,46.95 v1(42.5,46.55) ; U701.B3@42.1,51.75 v1(42.5,52.15) ; U701.B1@42.1,53.35 v1(42.5,53.75) ; v1(42.1,61.875) U700.B9@42.1,62.4 ; U700.B3@42.1,67.2 v1(42.5,67.6) ; U700.B1@42.1,68.8 v1(42.5,69.2) ; v1(42.55,101.875) 42.55,101.848 42.575,101.823 U500.11@42.575,100.75 v1(42.575,99.677) ; U701.A9@42.9,46.95 42.919,46.931 43.217,46.931 43.423,46.725 v1(43.45,46.725) ; U700.A9@42.9,62.4 v1(43.475,62.4) ; v1(43.05,101.875) 43.05,101.848 43.075,101.823 U500.10@43.075,100.75 v1(43.075,99.677) ; v1(43.55,101.875) 43.55,101.848 43.575,101.823 U500.9@43.575,100.75 v1(43.575,99.677) ; v1(43.65,107.387) 43.65,107.36 43.675,107.335 J500.5@43.675,106.262 v1(43.675,105.19) ; v1(46.1,99.625) 46.1,99.652 46.075,99.677 U500.4@46.075,100.75 v1(46.075,101.823) 46.075,103.15 46.55,103.625 46.55,103.65 46.875,103.975 C504.1@46.9,103.975 46.875,103.95 C505.1@46.875,102.7 ; U500.35@47.075,92.35 47.075,90.476 47.251,90.3 C513.1@49.72,90.3 ; U500.36@47.575,92.35 47.575,92.9 47.625,92.95 49.2,92.95 49.55,92.6 C514.1@49.55,92 ; v1(47.952,95.8) U500.41@49.025,95.8 50.098,95.8 50.123,95.825 v1(50.15,95.825) ; v1(47.952,96.3) U500.42@49.025,96.3 50.098,96.3 50.123,96.325 v1(50.15,96.325) 50.551,96.726 51.026,96.726 51.3,97 52.55,97 C501.1@52.6,96.95 ; v1(47.952,98.8) U500.47@49.025,98.8 50.098,98.8 50.123,98.825 v1(50.15,98.825) ; v1(47.952,99.3) U500.48@49.025,99.3 50.098,99.3 50.123,99.325 v1(50.15,99.325) ; v1(52.913,56.395) U300.M1@53.488,56.395 ; v1(52.925,64.4) 52.93,64.395 U300.B1@53.488,64.395 ; v1(53.888,50.395) U300.W2@54.288,50.795 ; v1(53.888,59.195) U300.J2@54.288,58.795 ; v1(54.688,52.795) U300.T3@55.088,53.195 ; v1(54.688,61.595) U300.F3@55.088,61.195 ; v1(55.488,55.195) U300.N4@55.888,55.595 ; v1(55.488,63.995) U300.C4@55.888,63.595 ; v1(56.288,58.395) U300.K5@56.688,57.995 ; v1(56.688,49.42) U300.Y5@56.688,49.995 ; v1(57.088,51.995) U300.U6@57.488,52.395 ; v1(57.888,54.395) U300.P7@58.288,54.795 ; v1(57.888,61.595) U300.F7@58.288,61.195 ; U300.T7@58.288,53.195 v1(59.488,54.395) U300.P9@59.888,54.795 ; U300.M7@58.288,56.395 v1(58.688,56.795) U300.L8@59.088,57.195 ; U300.H7@58.288,59.595 v1(58.688,59.195) U300.J8@59.088,58.795 v1(59.488,58.395) U300.K9@59.888,57.995 v1(60.288,58.395) U300.K10@60.688,57.995 61.088,57.595 ; U300.A8@59.088,65.195 v1(59.088,65.76) ; v1(59.488,55.995) U300.M9@59.888,56.395 ; v1(59.488,56.795) U300.L9@59.888,57.195 ; v1(59.488,59.995) U300.H9@59.888,59.595 ; v1(59.488,63.995) U300.C9@59.888,63.595 ; v2(59.675,8.222) J1500.17@59.675,9.513 v2(59.675,10.795) ; U300.V9@59.888,51.595 v1(60.288,51.195) ; v1(60.288,55.195) U300.N10@60.688,55.595 ; v1(60.288,55.995) U300.M10@60.688,56.395 ; v1(60.288,56.795) U300.L10@60.688,57.195 61.088,57.595 ; v1(60.288,59.195) U300.J10@60.688,58.795 ; v1(60.288,62.395) U300.E10@60.688,61.995 ; U300.G10@60.688,60.395 v1(60.288,60.795) U300.F10@60.688,61.195 ; v1(61.088,64.795) U300.B11@61.488,64.395 ; U300.P11@61.488,54.795 v1(61.888,54.395) ; U300.M11@61.488,56.395 v1(61.888,55.995) ; U300.H11@61.488,59.595 v1(61.888,59.995) U300.G12@62.288,60.395 v1(62.688,60.795) ; v1(61.888,51.195) U300.W12@62.288,50.795 ; v4@62.25,107.32 J1200.5@62.25,106.262 62.252,106.261 62.252,105.203 v4(62.253,105.202) ; U300.R12@62.288,53.995 62.688,53.595 ; U300.N12@62.288,55.595 v1(62.688,55.195) ; U300.L12@62.288,57.195 v1(62.688,56.795) ; v2(62.675,8.222) J1500.11@62.675,9.513 ; v1(62.688,59.195) v1(61.888,58.395) 61.088,57.595 ; U300.T13@63.088,53.195 v1(63.488,52.795) ; U300.P13@63.088,54.795 v1(63.488,54.395) ; U300.M13@63.088,56.395 v1(63.488,55.995) U300.N14@63.888,55.595 ; U300.K13@63.088,57.995 v1(63.488,58.395) ; U300.C14@63.888,63.595 v1(64.288,63.995) ; v2(64.175,8.222) J1500.8@64.175,9.513 v2(64.175,10.795) ; v1(64.261,98.812) 64.261,98.564 64.5,98.325 U1200.3@65.45,98.325 65.475,98.3 65.921,98.3 66.271,97.95 v3(66.325,97.95) ; U300.K15@64.688,57.995 v1(65.088,58.395) ; U300.U16@65.488,52.395 v1(65.888,51.995) ; U300.G16@65.492,60.361 v1@65.892,60.761 ; v2(65.675,8.222) J1500.5@65.675,9.513 v2(65.675,10.795) ; U300.P17@66.288,54.795 v1(66.688,54.395) ; U300.D17@66.288,62.795 v1(66.688,63.195) ; C1204.1@66.8,104.325 66.825,104.325 67.331,104.831 v1(67.331,105.106) ; U300.L18@67.088,57.195 v1(67.488,56.795) ; U300.A18@67.088,65.195 v1(67.488,64.795) ; v2(67.175,8.222) J1500.2@67.175,9.513 v2(67.175,10.795) ; U300.V19@67.888,51.595 v1(68.288,51.195) ; U300.H19@67.888,59.595 v1(68.288,59.995) ; v1(68.288,62.395) U300.E20@68.688,61.995 ; v1(68.4,105.325) 68.4,104.575 C1205.1@68.425,104.55 68.45,104.525 v1(69.25,104.525) ; U300.R20@68.688,53.995 v1(69.263,53.995) ; v1(83.326,98.499) 83.401,98.499 83.825,98.075 83.825,97.45 U1000.8@83.85,97.425 ; v4@83.7,107.933 J1000.5@83.7,106.875 83.702,106.873 83.702,105.816 v4(83.703,105.814) ; U1300.2@85.28,17.6 85.28,19.5 C1300.1@85.35,19.5 ; R1112.1@100.475,73.25 100.483,73.242 100.483,72.63 100.49,72.623 ; R1111.1@106.375,73.25 106.388,73.237 106.388,72.612 v1(106.4,72.6) ; v1(108.2,72.6) R1110.1@108.2,73.25
  S1 (SIG) w0.4: v2(36.075,32.809) J1600.10_1@36.075,34.1 v2(36.075,35.383) ; v2(36.075,36.559) J1600.10@36.075,37.85 v2(36.075,39.133) ; v2(39.075,32.809) J1600.7_1@39.075,34.1 v2(39.075,35.383) ; v2(39.075,36.559) J1600.7@39.075,37.85 v2(39.075,39.133) ; v2(42.075,32.809) J1600.4_1@42.075,34.1 v2(42.075,35.383) ; v2(42.075,36.559) J1600.4@42.075,37.85 v2(42.075,39.133) ; v2(45.075,32.809) J1600.1_1@45.075,34.1 v2(45.075,35.383) ; v2(45.075,36.559) J1600.1@45.075,37.85 v2(45.075,39.133)
  S10 (SIG) w0.2: C902.1@67.025,85.725 67.175,85.575 v1(67.846,85.575) ; C901.1@68.971,85.875 69.096,85.75 v1(69.096,84.775) ; v1(70.721,83.825) 70.721,82.904 C905.1@70.8,82.825 ; C907.1@70.725,90.425 70.75,90.4 v1(70.75,89.5) ; v1(71.275,86.625) 72,86.625 C900.1@72.075,86.55 ; v1(73.575,88.85) 73.575,87.725 C910.1@73.6,87.7 75.033,87.7 C911.1@75.036,87.697
  S10 (SIG) w0.3: R626.1@29.75,69.225 29.763,69.212 30.488,69.212 v1(30.5,69.2) 30.5,69.227 30.475,69.252 30.475,69.825 C743.1@30.375,69.925 ; C704.1@30.325,61.25 30.425,61.35 30.425,61.898 30.5,61.973 v1(30.5,62) ; C722.1@30.425,45.825 30.481,45.881 30.481,46.531 v1(30.5,46.55) ; C742.1@32.075,69.925 32.07,69.92 32.07,69.257 32.1,69.227 v1(32.1,69.2) ; C710.1@32.1,45.825 v1(32.1,46.55) ; v1(32.1,53.75) 32.113,53.762 32.113,54.462 C723.1@32.125,54.475 ; v1(33.7,46.55) 33.719,46.569 34.494,46.569 R701.1@34.55,46.625 ; v1(33.7,62) 33.713,61.987 33.713,61.337 C703.1@33.725,61.325 ; v1(34.5,53.75) 34.519,53.769 34.519,54.419 C711.1@34.55,54.45 ; v1(35.125,64.05) 35.125,64.077 35.175,64.127 35.175,64.575 R700.1@35.3,64.7 ; C740.1@35.275,48.925 35.275,48.875 35.981,48.169 36.081,48.169 v1(36.1,48.15) ; C702.1@36.1,62.8 v1(36.1,63.6) ; C726.1@36.675,53.8 36.675,53.1 36.875,52.9 C729.1@36.875,52.85 36.888,52.837 36.888,52.162 v1(36.9,52.15) ; C745.1@36.8,69.25 36.881,69.169 36.881,67.619 v1(36.9,67.6) ; C705.1@36.9,61.3 36.95,61.3 37.631,61.981 37.681,61.981 v1(37.7,62) ; C701.1@37.675,62.9 37.688,62.912 37.688,63.587 v1(37.7,63.6) ; C709.1@37.7,45.8 v1(37.7,46.55) ; C718.1@38.481,61.244 38.49,61.253 38.49,61.99 v1(38.5,62) ; C721.1@38.5,45.825 v1(38.5,46.55) ; C725.1@39.25,54.5 39.281,54.469 39.281,53.769 v1(39.3,53.75) ; C731.1@39.25,70.05 39.281,70.019 39.281,69.219 v1(39.3,69.2) ; v1(39.3,52.15) 39.319,52.169 40.744,52.169 C728.1@40.775,52.2 ; v1(40.1,53.75) 40.119,53.769 40.119,54.444 C738.1@40.15,54.475 ; v1(40.1,63.6) 40.119,63.581 40.454,63.581 40.459,63.575 40.725,63.575 C716.1@40.825,63.475 ; v1(40.1,67.6) 40.119,67.619 40.119,68.344 C734.1@40.15,68.375 ; v1(40.1,69.2) 40.119,69.219 40.169,69.219 40.8,69.85 C732.1@40.8,69.9 ; v1(41.698,94.8) 41.717,94.819 42.269,94.819 42.4,94.95 42.425,94.95 42.75,95.275 C512.1@42.75,95.3 ; v1(42.1,61.875) 42.119,61.856 42.119,61.709 42.534,61.294 C717.1@42.534,61.244 ; v1(42.5,46.55) 42.519,46.531 42.519,45.857 C737.1@42.56,45.816 ; v1(42.5,52.15) 42.519,52.169 42.619,52.169 43.225,52.775 C727.1@43.225,52.825 ; v1(42.5,67.6) 42.519,67.581 42.519,66.906 C735.1@42.55,66.875 ; v1(42.5,69.2) C733.1@42.5,69.85 ; v1(43.45,46.725) 43.477,46.725 43.552,46.8 44.125,46.8 C708.1@44.225,46.9 ; v1(43.475,62.4) 43.494,62.381 43.544,62.381 43.975,61.95 C715.1@44.025,61.95 ; v1(43.575,99.677) 43.575,99.075 C511.1@43.825,98.825 ; C510.1@45.55,98.525 45.575,98.525 46.35,99.3 v1(47.952,99.3) ; C509.1@46.725,97.325 46.725,97.3 47.706,96.319 47.933,96.319 v1(47.952,96.3) ; v1(50.15,95.825) v1(50.15,96.325) ; v1(52.913,56.395) 52.913,56.813 C344.1@53.15,57.05 ; v1(52.925,64.4) 53.315,64.4 C343.1@53.681,64.767 ; v1(53.888,50.395) 53.907,50.376 54.625,50.376 C341.1@54.725,50.275 ; C342.1@54.1,53.025 54.33,52.795 v1(54.688,52.795) ; C356.1@56,57.6 56.1,57.7 56.1,58.18 56.288,58.368 v1(56.288,58.395) ; v1(56.688,49.42) 56.707,49.439 56.989,49.439 57.2,49.65 57.25,49.65 57.35,49.75 C337.1@57.35,49.8 ; v1(57.888,54.395) C309.1@58.639,54.395 ; v1(57.888,61.595) 58.645,61.595 C300.1@58.65,61.6 ; C308.1@57.9,58.4 57.95,58.4 58.668,59.118 58.668,59.176 v1(58.688,59.195) ; C355.1@58.25,65.6 58.25,65.641 58.35,65.741 59.068,65.741 v1(59.088,65.76) ; C309.1@58.688,54.443 58.688,54.4 58.75,54.338 59.124,54.338 59.3,54.162 ; C320.1@59.4,53.7 59.3,53.8 59.3,54.162 ; C310.1@59.425,64.775 59.425,64.084 59.488,64.022 v1(59.488,63.995) ; v1(59.488,54.395) 59.488,54.368 59.3,54.18 59.3,54.162 ; v1(59.488,55.995) v1(60.288,55.995) v1(61.888,55.995) ; v1(59.488,58.395) 59.507,58.376 59.507,57.693 C333.1@59.6,57.6 ; v2(59.675,8.222) 59.713,8.183 59.713,7.762 59.775,7.7 59.775,7.675 60.1,7.35 C1511.1@60.125,7.35 ; v1(60.288,51.195) 61,50.482 61,50.4 61.04,50.36 C338.1@61.122,50.36 ; v1(60.288,55.195) 60.307,55.214 60.414,55.214 61.05,55.85 C318.1@61.1,55.85 ; v1(60.288,58.395) v1(60.288,59.195) ; v1(60.288,60.795) v1(59.488,59.995) v1(60.288,59.195) ; v1(60.288,62.395) 60.307,62.376 60.374,62.376 60.55,62.2 C306.1@61.1,62.2 ; v1(61.088,64.795) 61.107,64.814 61.107,65.057 61.5,65.45 C313.1@61.5,65.5 ; C317.1@61.1,58.5 61.205,58.395 v1(61.888,58.395) ; C319.1@61.1,59.45 60.543,59.45 v1(60.288,59.195) ; C321.1@61.9,53.7 61.894,53.706 61.894,54.389 v1(61.888,54.395) v1(62.688,55.195) v1(61.888,55.995) ; C347.1@62.65,57.6 62.669,57.581 62.669,56.814 v1(62.688,56.795) v1(61.888,55.995) ; v1(63.488,52.795) 63.507,52.776 63.507,52.63 C329.1@64.218,51.918 ; v1(63.488,55.995) 63.507,56.014 64.164,56.014 C307.1@64.2,56.05 ; v1(64.261,99.974) 64.261,101.011 C1201.1@64.475,101.225 ; v1(67.488,56.795) 67.507,56.814 67.636,56.814 68.04,57.218 C354.1@68.182,57.218 ; v1(67.488,64.795) 67.507,64.814 67.507,65.067 C326.1@68.17,65.73 ; v1(68.288,51.195) 68.307,51.214 68.336,51.214 68.74,51.618 C340.1@68.882,51.618 ; v1(68.288,59.995) 68.307,59.976 68.524,59.976 68.85,59.65 C353.1@68.9,59.65 ; v1(68.288,62.395) 68.288,62.368 68.718,61.937 C328.1@68.718,61.818 ; C339.1@69,53.1 68.965,53.135 68.965,53.277 69.243,53.556 69.243,53.976 v1(69.263,53.995) ; C1002.1@80.375,99.85 81.175,99.85 v1(81.6,100.275) ; C1004.1@80.4,97.525 80.425,97.525 80.75,97.85 80.75,98.437 80.826,98.514 v1(80.826,98.541) ; v1(81.875,101.275) 81.888,101.287 81.888,102.237 C1001.1@81.9,102.25 ; C1000.1@83.175,102.325 83.376,102.124 v1(83.376,100.999) ; v1(83.326,98.499) 83.345,98.518 83.345,99.145 83.55,99.35 83.55,99.375 83.875,99.7 C1003.1@83.9,99.7 ; C1102.1@101.8,83.875 102.575,83.875 v2(103.05,84.35) 103.05,85 C1109.1@103.375,85.325 ; C1115.1@102.25,80.975 102.25,81.1 v2(103.05,81.9) ; v2(104.4,81.9) 104.525,81.775 C1112.1@104.525,80.65 ; v2(104.4,84.35) 104.4,84.404 104.575,84.579 104.575,85.025 C1116.1@104.9,85.35 ; v2(105.75,83.125) 106.325,83.125 C1114.1@106.85,83.65 ; v2(105.75,84.35) 105.75,84.625 C1104.1@106.6,85.475 ; R1117.2@112.625,83.975 112.656,83.944 112.656,83.219 v1(112.675,83.2) ; v1(114.25,83.3) 114.269,83.319 114.269,83.994 X1100.2@114.3,84.025
  S10 (SIG) w1: J501.5@31.575,108.85 31.766,108.659 31.766,107.034 C516.1@32.2,106.6
  other v1: 96.525,12.875 97.144,12.875 97.762,12.875 98.381,12.875 99,12.875 81.375,13.7 80.825,13.725 85.28,18.55 85.1,20.225 85.65,20.225 81.525,21.425 82.325,21.425 86.525,21.45 85.95,21.475 67.875,26.35 65.375,26.425 72.9,27.75 72.85,29.85 53.7,34.675 72.9,35.725 68.475,36.75 72.875,36.775 53.55,37.15 72.88,37.772 64.15,37.825 66.15,38.05 67.725,38.15 66.15,41.425 64.35,41.45 67.95,41.45 63.1,42.5 68.25,46.325 67.025,47.25 69.35,47.4 70.4,47.425 64.75,47.825 71.05,48.925 71.925,49.7 72.7,50.5 73.375,51.275 74.05,51.9 74.7,52.525 75.525,53.275 76.325,53.8 77.1,54.275 77.775,54.775 49.75,55.425 48.575,55.625 63.488,59.995 48.538,60.025 49.863,60.025 65.888,60.795 74.45,63.65 74.75,65.7 61.15,69.4 63.15,70.125 115.465,72.648 71.9,72.95 75.725,73.125 103.85,73.5 102.05,73.525 105.625,73.525 99.775,73.55 107.275,73.6 98.25,73.625 77.125,74.2 77.175,75.775 46.003,78.047 74.675,88.65 75.275,88.65 52.6,91.45 53.225,91.45 53.8,92.075 53.8,92.6 42.65,97 61.875,97.65 63.068,97.65 64.261,97.65 42.65,97.7 52.325,97.775 52.875,97.775 51.05,97.8 51.6,97.8 61.875,98.812 63.068,98.812 81.601,99.266 82.601,99.274 51.625,99.55 52.325,99.55 61.875,99.974 63.068,99.974 82.601,100.274 50.609,101.049 51.223,101.049 80.875,101.05 46.075,102.745 39.65,103.3 45.95,103.725 39.65,103.9 53.8,104.15 54.484,104.154 52.825,104.4 39.625,104.475 52.8,105.025 39.625,105.1 43.15,105.175 20.725,106 22.1,106 23.325,106 24.7,106 25.8,106 27.175,106 28.375,106 29.75,106
  other v2: 61.75,4.975 62.55,4.975 63.35,4.975 64.15,4.975 64.95,4.975 65.75,4.975 66.55,4.975 67.35,4.975 68.15,4.975 59.425,23.525 60.9,23.525 62.25,23.55 63.1,23.55 64.375,23.575 65.825,23.575 47.826,78.389 50.048,78.389 47.826,79.963 50.048,79.963 47.826,81.537 50.048,81.537 105.75,81.9 103.05,83.125 104.4,83.125
  other v3: 66.325,96.65 66.325,97.3
  other v4: 76.4,105.975 77.1,105.975 78,105.975 78.7,105.975 62.248,107.322 83.698,107.934
HDMI_CEC: D1500.C D1501.2 J1500.13 U1500.48 | length 4.5
  S1 (SIG) w0.11: J1500.13@61.675,9.513 v2(61.675,10.825) 61.675,11.475 D1501.2@61.75,11.55 ; U1500.48@67.9,24.8 67.9,23.425 68.625,22.7 D1500.C@68.625,22.675
  other v2: 68.075,23.275
HDMI_CEC_CLK: R1510.1 U1500.50 | length 6.2
  S1 (SIG) w0.11: U1500.50@68.9,24.8 68.9,24.214 69.35,23.764 v1(69.35,23.7)
  S10 (SIG) w0.11: v1(69.35,23.7) 71.85,23.7 73.085,24.935 R1510.1@73.75,24.935
HDMI_CLK: U300.N17 U1500.79 | length 30.3
  S1 (SIG) w0.11: U300.N17@66.288,55.595 v1(66.688,55.195) ; U1500.79@67.4,40.25 67.4,41.713 67.65,41.963 v2(67.65,42.05)
  S8 (SIG) w0.1: v1(66.688,55.195) 71.455,55.195 71.76,54.89 71.81,54.84 71.811,54.839 ccw(c71.896,54.925) 71.896,54.804 72.67,54.804 cw(c72.67,54.734) 72.741,54.734 72.741,54.521 cw(c72.67,54.521) 72.67,54.45 71.449,54.45 ccw(c71.449,54.38) 71.378,54.38 71.378,54.167 ccw(c71.449,54.167) 71.449,54.096 72.67,54.096 cw(c72.67,54.026) 72.741,54.026 72.741,53.813 cw(c72.67,53.813) 72.67,53.742 71.449,53.742 ccw(c71.449,53.672) 71.378,53.672 71.378,53.459 ccw(c71.449,53.459) 71.449,53.388 72.67,53.388 cw(c72.67,53.318) 72.741,53.318 72.741,53.105 cw(c72.67,53.105) 72.67,53.034 71.462,53.034 ccw(c71.462,52.964) 71.391,52.964 71.391,52.751 ccw(c71.462,52.751) 71.462,52.68 71.975,52.68 cw(c71.975,52.58) 72.075,52.58 72.075,52.075 72.075,52.05 68.625,48.6 68.625,43.025 v2(67.65,42.05)
HDMI_COUT: R1510.2 X1500.3 | length 1.9
  S10 (SIG) w0.11: R1510.2@73.75,23.635 74.075,23.31 X1500.3@75.55,23.31
HDMI_D0: U300.V16 U1500.88 | length 29.6
  S1 (SIG) w0.11: v2(62.65,42.05) 62.65,41.963 62.9,41.713 U1500.88@62.9,40.25 ; U300.V16@65.488,51.595 v1(65.888,51.195)
  S8 (SIG) w0.1: v2(62.65,42.05) 62.175,42.525 62.175,42.812 62.175,42.862 62.104,42.932 60.43,42.932 60.36,43.003 60.36,43.216 60.43,43.286 62.467,43.286 62.538,43.357 62.538,43.57 62.467,43.64 60.948,43.64 60.877,43.711 60.877,43.924 60.948,43.994 62.467,43.994 62.538,44.065 62.538,44.278 62.467,44.348 61.571,44.348 61.5,44.419 61.5,44.632 61.571,44.702 62.467,44.702 62.538,44.773 62.538,44.986 62.467,45.056 61.571,45.056 61.5,45.127 61.5,45.34 61.571,45.41 62.467,45.41 62.538,45.481 62.538,45.694 62.467,45.764 61.571,45.764 61.5,45.835 61.5,46.048 61.571,46.118 62.467,46.118 62.538,46.189 62.538,46.402 62.467,46.472 61.571,46.472 61.5,46.543 61.5,46.756 61.571,46.826 62.467,46.826 62.538,46.897 62.538,47.11 62.467,47.18 61.571,47.18 61.5,47.251 61.5,47.464 61.571,47.534 62.176,47.534 62.447,47.805 65.837,51.195 v1(65.888,51.195)
HDMI_D1: U300.V17 U1500.87 | length 30.3
  S1 (SIG) w0.11: U1500.87@63.4,40.25 63.4,41.713 63.65,41.963 v2(63.65,42.05)
  S1 (SIG) w0.3: U300.V17@66.288,51.595 v1(66.688,51.195)
  S8 (SIG) w0.1: v2(63.65,42.05) 63.65,42.026 63.077,41.453 58.531,41.453 58.4,41.322 58.4,40.982 58.494,40.887 63.708,40.887 63.782,40.961 63.823,40.961 63.823,41.418 64.1,41.695 64.1,42.225 62.75,43.575 62.75,43.85 62.75,44.197 62.821,44.268 63.12,44.268 63.191,44.339 63.191,44.551 63.12,44.622 62.809,44.622 62.738,44.693 62.738,44.905 62.809,44.976 63.155,44.976 63.226,45.047 63.226,45.259 63.155,45.33 62.809,45.33 62.738,45.401 62.738,45.613 62.809,45.684 63.155,45.684 63.226,45.755 63.226,45.967 63.155,46.038 62.809,46.038 62.738,46.109 62.738,46.321 62.809,46.392 63.155,46.392 63.226,46.463 63.226,46.675 63.155,46.746 62.809,46.746 62.738,46.817 62.738,47.029 62.809,47.1 63.155,47.1 63.226,47.171 63.226,47.383 63.155,47.454 62.951,47.454 62.88,47.525 62.88,47.625 62.93,47.675 66.393,51.137 66.63,51.137 v1(66.688,51.195)
HDMI_D2: U300.W16 U1500.86 | length 30.9
  S1 (SIG) w0.11: v2(63.65,38.45) 63.65,38.537 63.9,38.787 U1500.86@63.9,40.25 ; v1(64.85,47.325) 65.375,47.325 65.888,47.838 65.888,50.395 U300.W16@65.488,50.795
  S8 (SIG) w0.1: v2(63.65,38.45) 63.65,38.95 63.65,39 63.579,39.071 60.351,39.071 60.28,39.142 60.28,39.354 60.351,39.425 64.273,39.425 64.344,39.496 64.344,39.708 64.273,39.779 60.351,39.779 60.28,39.85 60.28,40.062 60.351,40.133 64.177,40.133 64.248,40.204 64.248,40.416 64.177,40.487 64.124,40.487 64.053,40.558 64.053,40.658 64.268,40.873 65.05,41.655 65.05,42.216 64.85,42.416 v1(64.85,47.325)